# Altium PCB 单片机USB下载线_直插mega8.PCBDOC
Units mm, origin at the board's own origin, x right, y up, seen from the top; angles counter-clockwise.
Board outline 152.4 x 101.6 mm, 2 copper layers (Top Layer, Bottom Layer); 15 components, 19 nets, 68 pads, 3 vias.
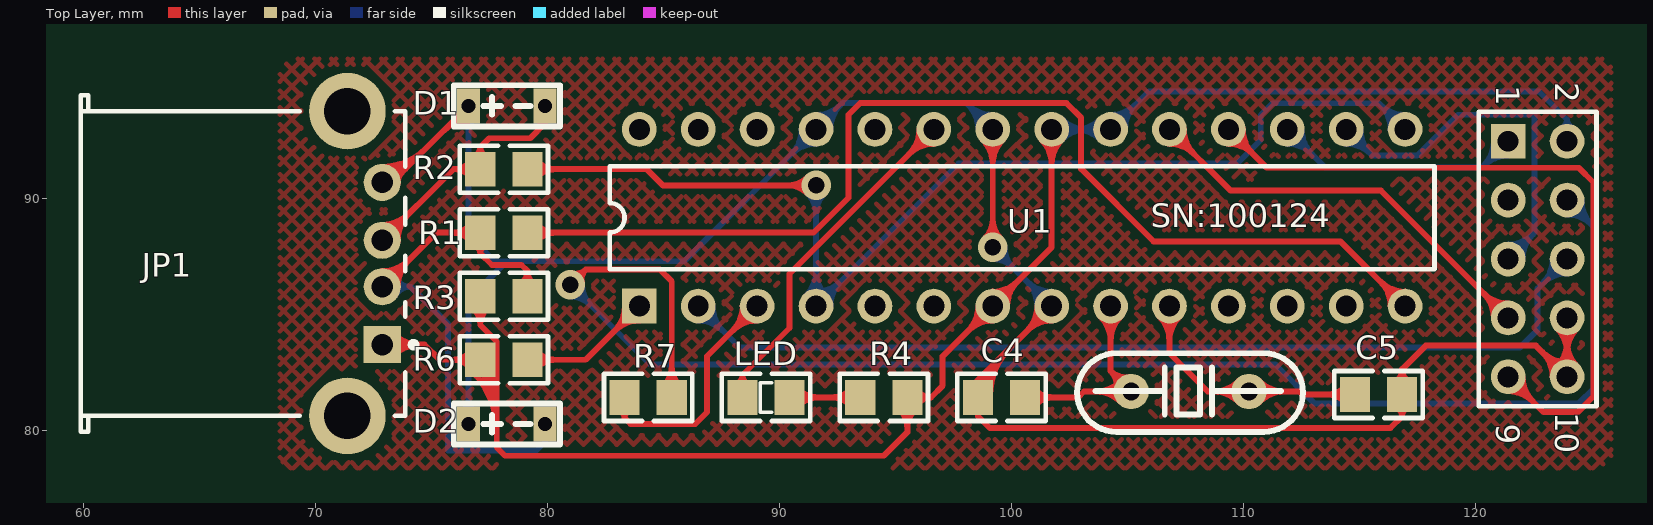
[diagram p0: Top Layer view]
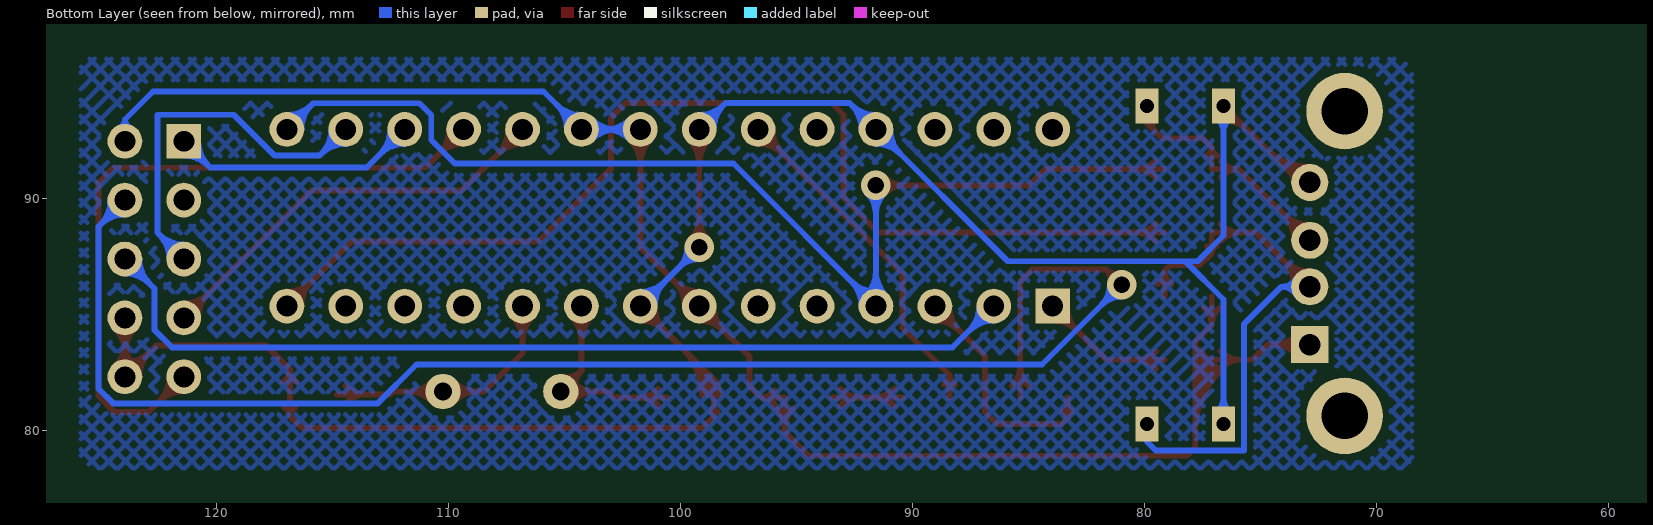
[diagram p1: Bottom Layer view, seen from below]

## Layer stack, top to bottom
Top Layer: signal copper 0.0356
Dielectric: dielectric 0.32, FR-4, Dk 4.8
Bottom Layer: signal copper 0.0356

## Board outline
25.4,25.4 177.8,25.4 177.8,127 25.4,127

## Design rules (kind name [scope] priority, off if disabled: settings)
Clearance [All] p1: gap=0.254
ComponentClearance [All] p1: gap=0.254 collisioncheckmode=3 verticalgap=0.254
PolygonConnect [All] p1: connectstyle=Relief reliefconductorwidth=0.254 reliefentries=4 polygonreliefangle="90 Angle"
RoutingTopology [All] p1: topology=Daisy_Simple
RoutingVias [All] p1: holewidth=0.711 width=1.27 viastyle="Through Hole" minholewidth=0.711 minwidth=1.27 maxholewidth=0.711 maxwidth=1.27
SolderMaskExpansion [All] p1: expansion=0.102
TestPointUsage [All] p1: valid=0 allowmultiple=FALSE
Testpoint [All] p1: side=15 testpointundercomponent=TRUE minsize=1.016 maxsize=2.54 preferedsize=1.524 minholesize=0 maxholesize=1.016 preferedholesize=0.813 testpointgrid=0.025 style=1023 order=0-112345678
Width [All] p1: maxlimit=0.254 minlimit=0.254 preferedwidth=0.254
16 further rules are at their usual default settings.

## Components (designator, comment, footprint, x,y, rotation, side; value= is the part's Value field where it differs from the comment)
C4 "" TP-0805-R 102.108,80.137 r0 top
C5 "" TP-0805-R 113.284,82.804 r180 top
D1 "Diode 11DQ03" TPDR 80.772,93.98 r0 top
D2 "Diode 11DQ03" TPDR 80.772,80.264 r0 top
ISP "" HDR2X5 121.412,92.456 r270 top
JP1 "4 HEADER" USB-5V 70.358,90.805 r180 top
LED "" TP-0805-D 86.868,82.677 r180 top (schematic designator LED2)
R1 "" TP-0805-R 80.645,87.241 r0 top
R2 "" TP-0805-R 75.565,92.521 r180 top
R3 "" TP-0805-R 75.565,87.041 r180 top
R4 "" TP-0805-R 97.028,80.137 r0 top
R6 "" TP-0805-R 75.565,84.301 r180 top
R7 "" TP-0805-R 81.788,82.677 r180 top
U1 "ATmega8-16PI" 28P3 100.457,89.154 r0 top
Y1 "XTAL" JZ_ZC 110.236,81.661 r0 top

## Footprints (in the part's own frame and the unit in brackets; to place one, negate y for a bottom-side part, rotate by r counter-clockwise, add the part's x,y. Pads: shape width x height; smd on the part's side, far side on the other; paste and mask are expansions set on the pad)
28P3 [mm] "DIP; 28 Leads; Row Spacing 7.62 mm; Pitch 2.54 mm"
  rect 1.5x1.5 hole 0.9: 1(-16.51,-3.81)
  round 1.5 hole 0.9: 2(-13.97,-3.81) 3(-11.43,-3.81) 4(-8.89,-3.81) 5(-6.35,-3.81) 6(-3.81,-3.81) 7(-1.27,-3.81) 8(1.27,-3.81) 9(3.81,-3.81) 10(6.35,-3.81) 11(8.89,-3.81) 12(11.43,-3.81) 13(13.97,-3.81) 14(16.51,-3.81) 15(16.51,3.81) 16(13.97,3.81) 17(11.43,3.81) 18(8.89,3.81) 19(6.35,3.81) 20(3.81,3.81) 21(1.27,3.81) 22(-1.27,3.81) 23(-3.81,3.81) 24(-6.35,3.81) 25(-8.89,3.81) 26(-11.43,3.81) 27(-13.97,3.81) 28(-16.51,3.81)
  silkscreen extent -17.78,-2.22 17.78,2.22
HDR2X5 [mm] "Connector; Header; 5x2 Position"
  rect 1.5x1.5 hole 0.9: 1(0,0)
  round 1.5 hole 0.9: 2(0,2.54) 3(2.54,0) 4(2.54,2.54) 5(5.08,0) 6(5.08,2.54) 7(7.62,0) 8(7.62,2.54) 9(10.16,0) 10(10.16,2.54)
  silkscreen extent -1.27,-1.27 11.43,3.81
JZ_ZC [mil] "晶振"
  round 60 hole 30: 1(-200,0) 2(0,0)
  silkscreen extent -292,-68 92,65
TP-0805-D [mm] "贴片二极管"
  rect 1.3x1.5 smd: 1(-3.556,1.27) 2(-1.524,1.27)
  silkscreen extent -4.44,0.25 -0.64,2.29
TP-0805-R [mm] "贴片0805"
  rect 1.3x1.5 smd: 1(-3.556,1.27) 2(-1.524,1.27)
  silkscreen extent -4.44,0.25 -0.64,2.29
TPDR [mm] "贴片电容"
  rect 1x1.5 hole 0.6: 1(-4.191,0) 2(-0.889,0)
  silkscreen extent -4.83,-0.89 -0.25,0.89
USB-5V [mm] "USB接口"
  rect 1.6x1.6 hole 0.92: 1(-2.503,7.123)
  round 1.6 hole 0.92: 2(-2.503,4.624) 3(-2.503,2.624) 4(-2.503,0.124)
  round 3.3 hole 2: 5(-1.002,-2.947) 6(-1.002,10.193)
  silkscreen extent -3.98,-3.63 10.5,10.87

## Part data
C4 C5: library part CAPSMD, "Capacitor SMD1206"
D1 D2: "Schottky Rectifier"
ISP: library part MLW10A, "Header, 5-Pin, Dual row, Right Angle"
JP1: "4 Pin Header"
LED: library part "LED Zöld", "Zöld Led 3mm"
R1 R2 R3 R4 R6 R7: library part RES, "Resistor SMD1206, 1% fémréteg"
U1: "8-Bit AVR Microcontroller with 8K Bytes of In-System Programmable Flash Memory"
Y1: "Crystal Oscillator"

## Via types
v1: diameter 1.27, hole 0.711, Top Layer to Bottom Layer, 3 vias

## Nets (pads, with @x,y where several pads share a name; then routed paths per layer and width w, separated by ;. In a path a pad name is that pad's centre, name@x,y a point inside that pad or via, vN(x,y) a via of type N, cw(c..) or ccw(c..) an arc to the next point about the centre after c; other vN are vias at no path point)
GND: C4.1 C5.1 D1.1 D2.1 ISP.8 ISP.10 JP1.4 U1.8 U1.22 U1.25 | length 148.1
  Top Layer w0.254: JP1.4 73.282,90.681 D1.1 ; JP1.4@72.861,90.846 ccw(c72.861,92.263) 73.862,91.261 ; JP1.4@72.861,91.1 ccw(c72.861,93.131) 74.296,91.695 ; JP1.4@72.861,91.354 ccw(c72.861,93.998) 74.73,92.129 ; JP1.4@73.534,90.681 cw(c74.14,90.681) 73.711,91.11 ; 75.517,92.916 cw(c76.581,91.853) D1.1@76.581,93.357 ; 75.951,93.35 cw(c76.581,92.72) D1.1@76.581,93.611 ; D1.1@76.121,93.52 ccw(c75.911,93.73) D1.1@76.208,93.73 ; C4.1@98.313,81.507 cw(c99.334,81.507) 98.612,82.229 ; C4.1@98.395,80.808 cw(c98.328,80.594) 98.552,80.594 ; C4.1@98.431,82.016 ccw(c98.395,82.169) 98.552,82.169 ; C4.1@98.567,81.507 cw(c100.201,81.507) 99.046,82.663 ; C4.1@98.673,82.016 cw(c98.709,82.169) 98.552,82.169 ; C4.1@98.709,80.808 ccw(c98.776,80.594) 98.552,80.594 ; U1.22@98.746,92.523 cw(c97.683,91.46) 99.187,91.46 cw(c100.691,91.46) U1.22@99.628,92.523 ; C4.1@98.821,81.507 cw(c101.069,81.507) 99.479,83.096 ; v1@98.828,88.243 ccw(c97.961,89.11) 99.187,89.11 ccw(c100.413,89.11) v1@99.546,88.243 ; U1.22@98.926,92.703 cw(c98.296,92.073) 99.187,92.073 cw(c100.078,92.073) U1.22@99.448,92.703 ; C4.1@99.075,81.507 cw(c101.936,81.507) 99.913,83.53 ; v1(99.187,87.884) U1.22 ; U1.8@101.104,85.344 cw(c99.6,85.344) 100.663,84.28 cw(c101.727,83.217) U1.8@101.727,84.721 ; U1.8@101.358,85.344 cw(c100.467,85.344) 101.097,84.714 cw(c101.727,84.084) U1.8@101.727,84.975 ; U1.8 98.552,82.169 ; C5.1@116.544,82.065 ccw(c116.16,82.626) 116.84,82.626 ; C5.1@116.609,80.965 cw(c116.427,80.594) 116.84,80.594 ; C5.1@117.071,80.965 ccw(c117.253,80.594) 116.84,80.594 ; C5.1@117.136,82.065 cw(c117.52,82.626) 116.84,82.626 ; ISP.10@123.329,82.296 ccw(c121.825,82.296) 122.888,83.36 ccw(c123.952,84.423) ISP.10@123.952,82.919 ; ISP.10@123.511,82.737 ccw(c122.448,83.8) 123.952,83.8 ccw(c125.456,83.8) ISP.10@124.393,82.737 ; ISP.8@123.511,84.395 cw(c122.448,83.332) 123.952,83.332 cw(c125.456,83.332) ISP.8@124.393,84.395 ; ISP.10@123.583,82.296 ccw(c122.692,82.296) 123.322,82.926 ccw(c123.952,83.556) ISP.10@123.952,82.665 ; ISP.10@123.691,82.557 ccw(c123.061,83.187) 123.952,83.187 ccw(c124.843,83.187) ISP.10@124.213,82.557 ; ISP.8@123.691,84.575 cw(c123.061,83.945) 123.952,83.945 cw(c124.843,83.945) ISP.8@124.213,84.575 ; ISP.8 ISP.10 122.606,83.642 117.856,83.642 116.84,82.626 ; 98.552,80.594 C4.1 98.552,82.169 ; 98.552,80.594 99.06,80.086 116.332,80.086 116.84,80.594 ; 116.84,80.594 C5.1 116.84,82.626
  Bottom Layer w0.254: D2.1@76.317,80.778 ccw(c75.681,81.414) 76.581,81.414 ccw(c77.481,81.414) D2.1@76.845,80.778 ; D1.1@76.317,93.466 cw(c75.681,92.83) 76.581,92.83 cw(c77.481,92.83) D1.1@76.845,93.466 ; D2.1 76.581,85.63 78.232,87.281 ; D1.1 76.581,88.392 77.692,87.281 78.232,87.281 ; U1.25@90.944,92.964 cw(c89.44,92.964) 90.503,91.9 cw(c91.567,90.837) U1.25@91.567,92.341 ; U1.25@91.198,92.964 cw(c90.307,92.964) 90.937,92.334 cw(c91.567,91.704) U1.25@91.567,92.595 ; U1.25@91.567,93.333 ccw(c91.567,94.224) 92.197,93.594 ccw(c92.827,92.964) U1.25@91.936,92.964 ; U1.25@91.567,93.587 ccw(c91.567,95.091) 92.631,94.028 ccw(c93.694,92.964) U1.25@92.19,92.964 ; U1.22@98.564,92.964 ccw(c97.06,92.964) 98.123,94.028 ccw(c99.187,95.091) U1.22@99.187,93.587 ; U1.22@98.818,92.964 ccw(c97.927,92.964) 98.557,93.594 ccw(c99.187,94.224) U1.22@99.187,93.333 ; v1@99.187,87.376 cw(c99.187,86.15) 100.054,87.017 cw(c100.921,87.884) v1@99.695,87.884 ; v1(99.187,87.884) U1.8 ; U1.22 98.044,94.107 92.71,94.107 U1.25 85.884,87.281 78.232,87.281 ; U1.8@101.104,85.344 ccw(c99.6,85.344) 100.663,86.408 ccw(c101.727,87.471) U1.8@101.727,85.967 ; U1.8@101.358,85.344 ccw(c100.467,85.344) 101.097,85.974 ccw(c101.727,86.604) U1.8@101.727,85.713
MISO: ISP.9 U1.18 | length 38
  Top Layer w0.254: U1.18@109.347,92.341 cw(c109.347,90.837) 110.411,91.9 cw(c111.474,92.964) U1.18@109.97,92.964 ; U1.18@109.347,92.595 cw(c109.347,91.704) 109.977,92.334 cw(c110.607,92.964) U1.18@109.716,92.964 ; U1.18 110.998,91.313 124.46,91.313 125.095,90.678 125.095,81.458 124.409,80.772 122.936,80.772 ISP.9 ; ISP.9@121.412,81.673 cw(c121.412,80.169) 122.476,81.232 cw(c123.539,82.296) ISP.9@122.035,82.296 ; ISP.9@121.412,81.927 cw(c121.412,81.036) 122.042,81.666 cw(c122.672,82.296) ISP.9@121.781,82.296
MOSI: ISP.1 U1.17 | length 18.2
  Bottom Layer w0.254: U1.17@111.887,92.341 cw(c111.887,90.837) 112.951,91.9 cw(c114.014,92.964) U1.17@112.51,92.964 ; U1.17@111.887,92.595 cw(c111.887,91.704) 112.517,92.334 cw(c113.147,92.964) U1.17@112.256,92.964 ; U1.17 113.526,91.325 120.281,91.325 ISP.1 ; ISP.1@120.789,92.456 cw(c119.285,92.456) 120.348,91.392 cw(c121.412,90.329) ISP.1@121.412,91.833 ; ISP.1@121.043,92.456 cw(c120.152,92.456) 120.782,91.826 cw(c121.412,91.196) ISP.1@121.412,92.087
NetD1_2: D1.2 JP1.3 R2.2 | length 19.1
  Top Layer w0.254: JP1.3 75.93,91.251 ; JP1.3@72.861,88.6 ccw(c72.861,89.612) 73.576,88.897 ccw(c74.291,88.181) JP1.3@73.28,88.181 ; JP1.3@72.861,88.854 ccw(c72.861,90.479) 74.009,89.33 ccw(c75.158,88.181) JP1.3@73.534,88.181 ; R2.2@76.697,90.905 ccw(c75.93,90.229) 75.93,91.251 ; R2.2@76.697,91.597 cw(c75.93,92.273) 75.93,91.251 ; R2.2@76.853,91.818 ccw(c76.658,92.202) 77.089,92.202 ; R2.2@77.325,91.818 cw(c77.52,92.202) 77.089,92.202 ; 79.504,92.839 ccw(c79.12,93.223) D1.2@79.572,93.524 ; 79.723,93.058 ccw(c79.384,93.398) D1.2@79.784,93.664 ; D1.2@79.769,93.375 cw(c79.718,93.218) 79.883,93.218 ; D1.2 79.883,93.218 ; D1.2@79.997,93.375 ccw(c80.048,93.218) 79.883,93.218 ; 75.93,91.251 R2.2 77.089,92.202 ; 77.089,92.202 77.47,92.583 79.248,92.583 79.883,93.218
NetD2_2: D2.2 JP1.2 R1.1 R3.1 | length 33.8
  Top Layer w0.254: JP1.2 75.19,88.511 R1.1 77.089,87.63 ; JP1.2@72.861,86.6 ccw(c72.861,87.612) 73.576,86.897 ccw(c74.291,86.181) JP1.2@73.28,86.181 ; JP1.2@72.861,86.854 ccw(c72.861,88.479) 74.009,87.33 ccw(c75.158,86.181) JP1.2@73.534,86.181 ; R1.1@76.719,88.141 ccw(c75.826,87.248) 75.826,88.511 ccw(c75.826,89.774) R1.1@76.719,88.881 ; R1.1@76.89,87.927 cw(c76.767,87.63) 77.089,87.63 ; R1.1@77.288,87.927 ccw(c77.411,87.63) 77.089,87.63 ; R3.1@78.824,86.301 ccw(c78.432,86.868) 79.121,86.868 ; R3.1 79.121,86.868 ; R3.1@79.418,86.301 cw(c79.81,86.868) 79.121,86.868 ; 77.089,87.63 77.597,87.122 78.867,87.122 79.121,86.868
  Bottom Layer w0.254: JP1.2 74.093,86.181 ; JP1.2@73.427,85.818 cw(c74.092,85.39) 74.092,86.181 ; JP1.2@73.427,86.545 ccw(c74.092,86.973) 74.092,86.181 ; D2.2@79.769,79.659 cw(c79.718,79.502) 79.883,79.502 ; D2.2 79.883,79.502 ; D2.2@79.997,79.659 ccw(c80.048,79.502) 79.883,79.502 ; 74.093,86.181 75.692,84.582 75.692,79.121 79.502,79.121 79.883,79.502
NetISP_2: 
NetISP_4: ISP.4 R7.1 | length 73.8
  Top Layer w0.254: v1(80.975,86.258) 81.636,86.919 ; v1@81.082,86.755 ccw(c81.208,87.346) 81.636,86.919 ; v1@81.472,86.365 cw(c82.063,86.491) 81.636,86.919 ; R7.1@84.974,81.877 ccw(c84.081,82.77) 85.344,82.77 ccw(c86.607,82.77) R7.1@85.714,81.877 ; R7.1 85.344,86.411 84.836,86.919 81.636,86.919
  Bottom Layer w0.254: v1@80.975,85.75 cw(c80.975,84.524) 81.842,85.391 cw(c82.71,86.258) v1@81.483,86.258 ; v1(80.975,86.258) 84.404,82.829 111.379,82.829 113.055,81.153 124.46,81.153 125.095,81.788 125.095,88.773 ISP.4 ; ISP.4@123.952,89.293 cw(c123.952,87.789) 125.016,88.852 cw(c126.079,89.916) ISP.4@124.575,89.916 ; ISP.4@123.952,89.547 cw(c123.952,88.656) 124.582,89.286 cw(c125.212,89.916) ISP.4@124.321,89.916
NetLED2_1: LED.1 R4.1 | length 7
  Top Layer w0.254: LED.1 R4.1 ; LED.1@90.794,81.037 cw(c91.687,80.144) 91.687,81.407 cw(c91.687,82.67) LED.1@90.794,81.777 ; R4.1@93.102,81.037 ccw(c92.209,80.144) 92.209,81.407 ccw(c92.209,82.67) R4.1@93.102,81.777
NetLED2_2: LED.2 U1.23 | length 19.7
  Top Layer w0.254: LED.2@88.149,81.97 ccw(c87.938,82.372) 88.392,82.372 ; LED.2 88.392,82.372 ; LED.2@88.635,81.97 cw(c88.846,82.372) 88.392,82.372 ; U1.23@96.024,92.964 cw(c94.52,92.964) 95.583,91.9 cw(c96.647,90.837) U1.23@96.647,92.341 ; U1.23@96.278,92.964 cw(c95.387,92.964) 96.017,92.334 cw(c96.647,91.704) U1.23@96.647,92.595 ; U1.23 90.424,86.741 90.424,84.404 88.392,82.372
NetR6_1: R6.1 U1.1 | length 11.5
  Top Layer w0.254: R6.1 81.634,83.031 U1.1 ; R6.1@79.491,82.661 cw(c80.384,81.768) 80.384,83.031 cw(c80.384,84.294) R6.1@79.491,83.401 ; U1.1@83.324,85.344 cw(c81.82,85.344) 82.883,84.28 cw(c83.947,83.217) U1.1@83.947,84.721 ; U1.1@83.578,85.344 cw(c82.687,85.344) 83.317,84.714 cw(c83.947,84.084) U1.1@83.947,84.975
PB0: R1.2 U1.14 | length 52.9
  Top Layer w0.254: R1.2 91.457,88.511 92.964,90.018 92.964,93.599 93.472,94.107 102.362,94.107 102.997,93.472 102.997,91.262 106.121,88.138 114.173,88.138 U1.14 ; R1.2@79.491,88.141 cw(c80.384,87.248) 80.384,88.511 cw(c80.384,89.774) R1.2@79.491,88.881 ; U1.14@116.344,85.344 ccw(c114.84,85.344) 115.903,86.408 ccw(c116.967,87.471) U1.14@116.967,85.967 ; U1.14@116.598,85.344 ccw(c115.707,85.344) 116.337,85.974 ccw(c116.967,86.604) U1.14@116.967,85.713
PB1: R2.1 U1.4 U1.15 | length 65.2
  Top Layer w0.254: R2.1 84.263,91.251 84.963,90.551 v1(91.567,90.551) ; R2.1@79.491,90.881 cw(c80.384,89.988) 80.384,91.251 cw(c80.384,92.514) R2.1@79.491,91.621 ; v1@91.208,90.192 ccw(c90.341,89.325) 90.341,90.551 ccw(c90.341,91.777) v1@91.208,90.91
  Bottom Layer w0.254: U1.4@91.126,85.785 ccw(c90.063,86.848) 91.567,86.848 ccw(c93.071,86.848) U1.4@92.008,85.785 ; v1@91.208,90.192 cw(c90.341,89.325) 91.567,89.325 cw(c92.793,89.325) v1@91.926,90.192 ; U1.4@91.306,85.605 ccw(c90.676,86.235) 91.567,86.235 ccw(c92.458,86.235) U1.4@91.828,85.605 ; U1.4@91.567,85.713 ccw(c91.567,86.604) 92.197,85.974 ccw(c92.827,85.344) U1.4@91.936,85.344 ; U1.4@91.567,85.967 ccw(c91.567,87.471) 92.631,86.408 ccw(c93.694,85.344) U1.4@92.19,85.344 ; v1(91.567,90.551) U1.4 97.714,91.491 109.728,91.491 110.744,92.507 110.744,93.587 111.252,94.095 115.836,94.095 U1.15 ; U1.15@116.344,92.964 ccw(c114.84,92.964) 115.903,94.028 ccw(c116.967,95.091) U1.15@116.967,93.587 ; U1.15@116.598,92.964 ccw(c115.707,92.964) 116.337,93.594 ccw(c116.967,94.224) U1.15@116.967,93.333
PB6: C4.2 U1.9 Y1.1 | length 20.1
  Top Layer w0.254: C4.2 102.87,81.407 103.124,81.661 Y1.1 104.267,82.55 ; C4.2@100.954,81.037 cw(c101.847,80.144) 101.847,81.407 cw(c101.847,82.67) C4.2@100.954,81.777 ; U1.9@103.826,84.903 cw(c102.763,83.84) 104.267,83.84 cw(c105.771,83.84) U1.9@104.708,84.903 ; U1.9@104.006,85.083 cw(c103.376,84.453) 104.267,84.453 cw(c105.158,84.453) U1.9@104.528,85.083 ; U1.9 104.267,82.55 ; Y1.1@104.528,81.756 ccw(c103.612,81.894) 104.267,82.55 ; Y1.1@104.707,81.212 ccw(c103.623,80.128) 103.623,81.661 ccw(c103.623,83.194) Y1.1@104.707,82.11 ; Y1.1@104.887,81.392 ccw(c104.236,80.741) 104.236,81.661 ccw(c104.236,82.581) Y1.1@104.887,81.93 ; Y1.1@105.061,82.289 cw(c104.923,83.205) 104.267,82.55
PB7: C5.2 U1.10 Y1.2 | length 24.2
  Top Layer w0.254: U1.10@106.366,84.903 cw(c105.303,83.84) 106.807,83.84 cw(c108.311,83.84) U1.10@107.248,84.903 ; U1.10@106.546,85.083 cw(c105.916,84.453) 106.807,84.453 cw(c107.698,84.453) U1.10@107.068,85.083 ; U1.10 106.807,83.312 108.458,81.661 Y1.2 112.395,81.661 112.522,81.534 C5.2 ; Y1.2@109.787,81.212 ccw(c108.703,80.128) 108.703,81.661 ccw(c108.703,83.194) Y1.2@109.787,82.11 ; Y1.2@109.967,81.392 ccw(c109.316,80.741) 109.316,81.661 ccw(c109.316,82.581) Y1.2@109.967,81.93 ; Y1.2@110.505,81.392 cw(c111.156,80.741) 111.156,81.661 cw(c111.156,82.581) Y1.2@110.505,81.93 ; Y1.2@110.685,81.212 cw(c111.769,80.128) 111.769,81.661 cw(c111.769,83.194) Y1.2@110.685,82.11 ; C5.2@114.438,81.164 ccw(c113.545,80.271) 113.545,81.534 ccw(c113.545,82.797) C5.2@114.438,81.904
PD0: ISP.6 U1.2 | length 48.3
  Bottom Layer w0.254: U1.2@86.487,84.721 cw(c86.487,83.217) 87.551,84.28 cw(c88.614,85.344) U1.2@87.11,85.344 ; U1.2@86.487,84.975 cw(c86.487,84.084) 87.117,84.714 cw(c87.747,85.344) U1.2@86.856,85.344 ; U1.2 88.265,83.566 121.92,83.566 122.682,84.328 122.682,86.106 ISP.6 ; ISP.6@123.329,87.376 cw(c121.825,87.376) 122.888,86.312 cw(c123.952,85.249) ISP.6@123.952,86.753 ; ISP.6@123.583,87.376 cw(c122.692,87.376) 123.322,86.746 cw(c123.952,86.116) ISP.6@123.952,87.007
PD1: R7.2 U1.3 | length 14.8
  Top Layer w0.254: R7.2@83.108,80.825 cw(c82.978,80.518) 83.312,80.518 ; R7.2 83.312,80.518 ; R7.2@83.516,80.825 ccw(c83.646,80.518) 83.312,80.518 ; U1.3@88.404,85.344 cw(c86.9,85.344) 87.963,84.28 cw(c89.027,83.217) U1.3@89.027,84.721 ; U1.3@88.658,85.344 cw(c87.767,85.344) 88.397,84.714 cw(c89.027,84.084) U1.3@89.027,84.975 ; U1.3 86.868,83.185 86.868,80.772 86.36,80.264 83.566,80.264 83.312,80.518
RESET: ISP.5 U1.16 | length 23.5
  Bottom Layer w0.254: U1.16@114.427,92.341 cw(c114.427,90.837) 115.491,91.9 cw(c116.554,92.964) U1.16@115.05,92.964 ; U1.16@114.427,92.595 cw(c114.427,91.704) 115.057,92.334 cw(c115.687,92.964) U1.16@114.796,92.964 ; U1.16 115.558,91.833 117.487,91.833 119.253,93.599 122.555,93.599 122.555,88.519 ISP.5 ; ISP.5@121.412,87.745 ccw(c121.412,88.636) 122.042,88.006 ccw(c122.672,87.376) ISP.5@121.781,87.376 ; ISP.5@121.412,87.999 ccw(c121.412,89.503) 122.476,88.44 ccw(c123.539,87.376) ISP.5@122.035,87.376
SCK: ISP.7 U1.19 | length 25.5
  Top Layer w0.254: U1.19@106.807,92.341 cw(c106.807,90.837) 107.871,91.9 cw(c108.934,92.964) U1.19@107.43,92.964 ; U1.19@106.807,92.595 cw(c106.807,91.704) 107.437,92.334 cw(c108.067,92.964) U1.19@107.176,92.964 ; U1.19 109.449,90.322 115.926,90.322 ISP.7 ; ISP.7@120.789,84.836 ccw(c119.285,84.836) 120.348,85.9 ccw(c121.412,86.963) ISP.7@121.412,85.459 ; ISP.7@121.043,84.836 ccw(c120.152,84.836) 120.782,85.466 ccw(c121.412,86.096) ISP.7@121.412,85.205
VCC: ISP.2 JP1.1 R3.2 R4.2 R6.2 U1.7 U1.20 U1.21 | length 116.3
  Top Layer w0.254: JP1.1 74.687,83.682 75.338,83.031 R6.2 77.8,83.031 ; JP1.1@73.157,83.385 cw(c73.872,82.67) 73.872,83.682 cw(c73.872,84.693) JP1.1@73.157,83.978 ; JP1.1@73.336,83.206 cw(c74.485,82.057) 74.485,83.682 cw(c74.485,85.306) JP1.1@73.336,84.157 ; R6.2@76.719,82.561 cw(c74.109,79.951) 77.8,79.951 ; R6.2@76.719,82.661 ccw(c75.826,81.768) 75.826,83.031 ccw(c75.826,84.294) R6.2@76.719,83.401 ; R3.2@76.748,85.275 cw(c76.109,84.531) 77.089,84.531 ; R6.2@76.899,82.741 cw(c74.723,80.565) 77.8,80.565 ; R6.2@77.078,82.92 cw(c75.336,81.178) 77.8,81.178 ; R3.2 77.089,84.531 ; R6.2@77.258,83.1 cw(c75.949,81.791) 77.8,81.791 ; R3.2@77.43,85.275 ccw(c78.069,84.531) 77.089,84.531 ; R6.2@77.438,83.28 cw(c76.562,82.404) 77.8,82.404 ; R6.2@77.588,82.875 cw(c77.8,82.809) 77.8,83.031 ; R6.2@77.588,83.187 ccw(c77.8,83.253) 77.8,83.031 ; R6.2@77.617,83.459 cw(c77.175,83.017) 77.8,83.017 ; R4.2@95.134,80.937 cw(c94.241,80.044) 95.504,80.044 cw(c96.767,80.044) R4.2@95.874,80.937 ; R4.2@95.93,81.103 cw(c96.52,80.682) 96.52,81.407 ; R4.2@95.93,81.711 ccw(c96.52,82.132) 96.52,81.407 ; U1.7@98.564,85.344 cw(c97.06,85.344) 98.123,84.28 cw(c99.187,83.217) U1.7@99.187,84.721 ; U1.7@98.818,85.344 cw(c97.927,85.344) 98.557,84.714 cw(c99.187,84.084) U1.7@99.187,84.975 ; U1.7@99.187,85.713 ccw(c99.187,86.604) 99.817,85.974 ccw(c100.447,85.344) U1.7@99.556,85.344 ; U1.7@99.187,85.967 ccw(c99.187,87.471) 100.251,86.408 ccw(c101.314,85.344) U1.7@99.81,85.344 ; U1.21@101.286,92.523 cw(c100.223,91.46) 101.727,91.46 cw(c103.231,91.46) U1.21@102.168,92.523 ; U1.21@101.466,92.703 cw(c100.836,92.073) 101.727,92.073 cw(c102.618,92.073) U1.21@101.988,92.703 ; U1.21 101.727,87.884 U1.7 97.028,83.185 97.028,81.915 96.52,81.407 ; 77.089,84.531 77.8,83.82 77.8,83.031 ; 77.8,83.031 77.8,79.248 78.156,78.892 94.488,78.892 95.504,79.908 R4.2 96.52,81.407
  Bottom Layer w0.254: U1.21 U1.20 105.906,94.603 122.742,94.603 123.952,93.393 ; U1.21@101.988,92.703 cw(c102.618,92.073) 102.618,92.964 cw(c102.618,93.855) U1.21@101.988,93.225 ; U1.21@102.168,92.523 cw(c103.231,91.46) 103.231,92.964 cw(c103.231,94.468) U1.21@102.168,93.405 ; U1.20@103.826,92.523 ccw(c102.763,91.46) 102.763,92.964 ccw(c102.763,94.468) U1.20@103.826,93.405 ; U1.20@104.006,92.703 ccw(c103.376,92.073) 103.376,92.964 ccw(c103.376,93.855) U1.20@104.006,93.225 ; U1.20@104.267,93.333 ccw(c104.267,94.224) 104.897,93.594 ccw(c105.527,92.964) U1.20@104.636,92.964 ; U1.20@104.267,93.587 ccw(c104.267,95.091) 105.331,94.028 ccw(c106.394,92.964) U1.20@104.89,92.964 ; ISP.2@123.711,93.031 ccw(c123.559,93.393) 123.952,93.393 ; ISP.2 123.952,93.393 ; ISP.2@124.193,93.031 cw(c124.345,93.393) 123.952,93.393
pads on no net: ISP.3 JP1.5 JP1.6 U1.5 U1.6 U1.11 U1.12 U1.13 U1.24 U1.26 U1.27 U1.28

## Polygon pours and split planes (outlines as drawn)
no net on Top Layer (hatched 45Degree grid 0.508 track 0.203): 68.961,96.012 68.453,95.504 68.453,78.74 68.834,78.359 125.349,78.359 125.857,78.867 125.857,95.631 125.476,96.012
no net on Bottom Layer (hatched 45Degree grid 0.508 track 0.203): 68.961,96.012 68.453,95.504 68.453,78.74 68.834,78.359 125.349,78.359 125.857,78.867 125.857,95.631 125.476,96.012

## Silkscreen, mask and mechanical layers (free items; w line width, h text height)
Top Overlay:
  text "SN:100124" at 105.994,88.752 h1.02
Mechanical 1:
  lines w0.2: 124.587,77.978 125.603,77.978 126.238,78.613 126.238,95.885 125.73,96.393 ; 124.841,77.978 68.58,77.978 68.072,78.486 68.072,79.375 68.072,95.758 68.707,96.393 125.73,96.393 ; 125.476,96.393 125.73,96.393

## Text inside footprints (layer, text, board x,y; h text height)
ISP: Top Overlay "2" at 123.444,94.996 h1.02 r270; Top Overlay "1" at 120.904,94.869 h1.02 r270; Top Overlay "9" at 120.904,80.264 h1.02 r270; Top Overlay "10" at 123.444,80.772 h1.02 r270